# Altium PCB ilk.PcbDoc
Units mil, origin at the board's own origin, x right, y up, seen from the top; angles counter-clockwise.
Board outline 2700 x 1400 mil, 2 copper layers (Top Layer, Bottom Layer); 64 components, 36 nets, 208 pads, 42 vias.
Unrouted connection lines stored in the file: 56.
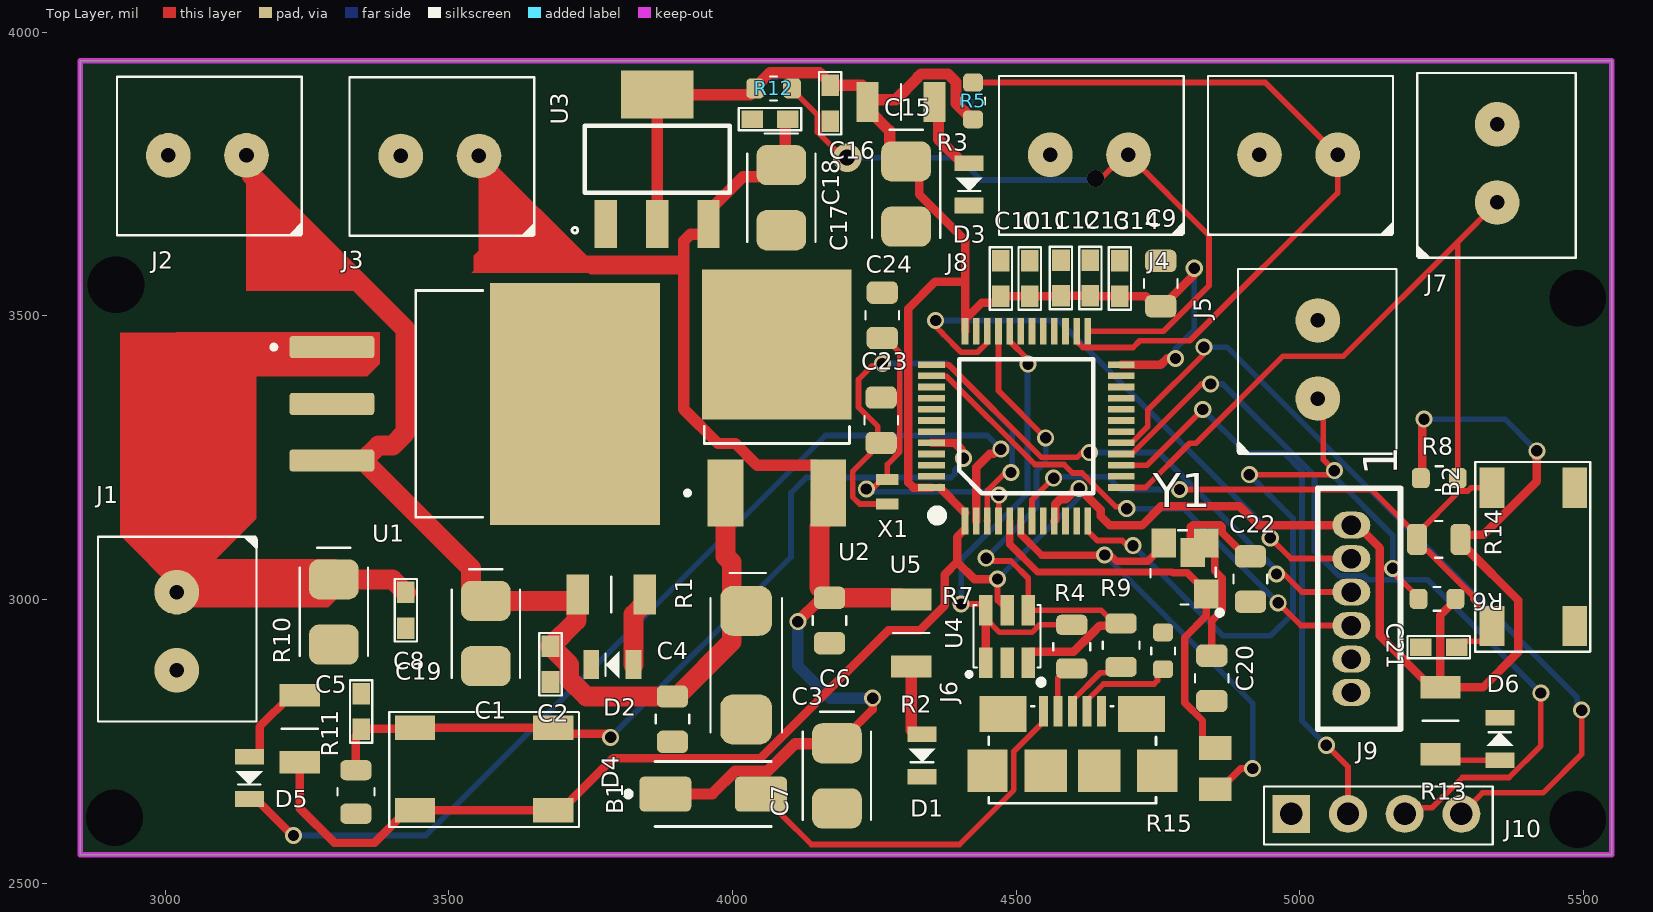
[diagram p0: Top Layer view]
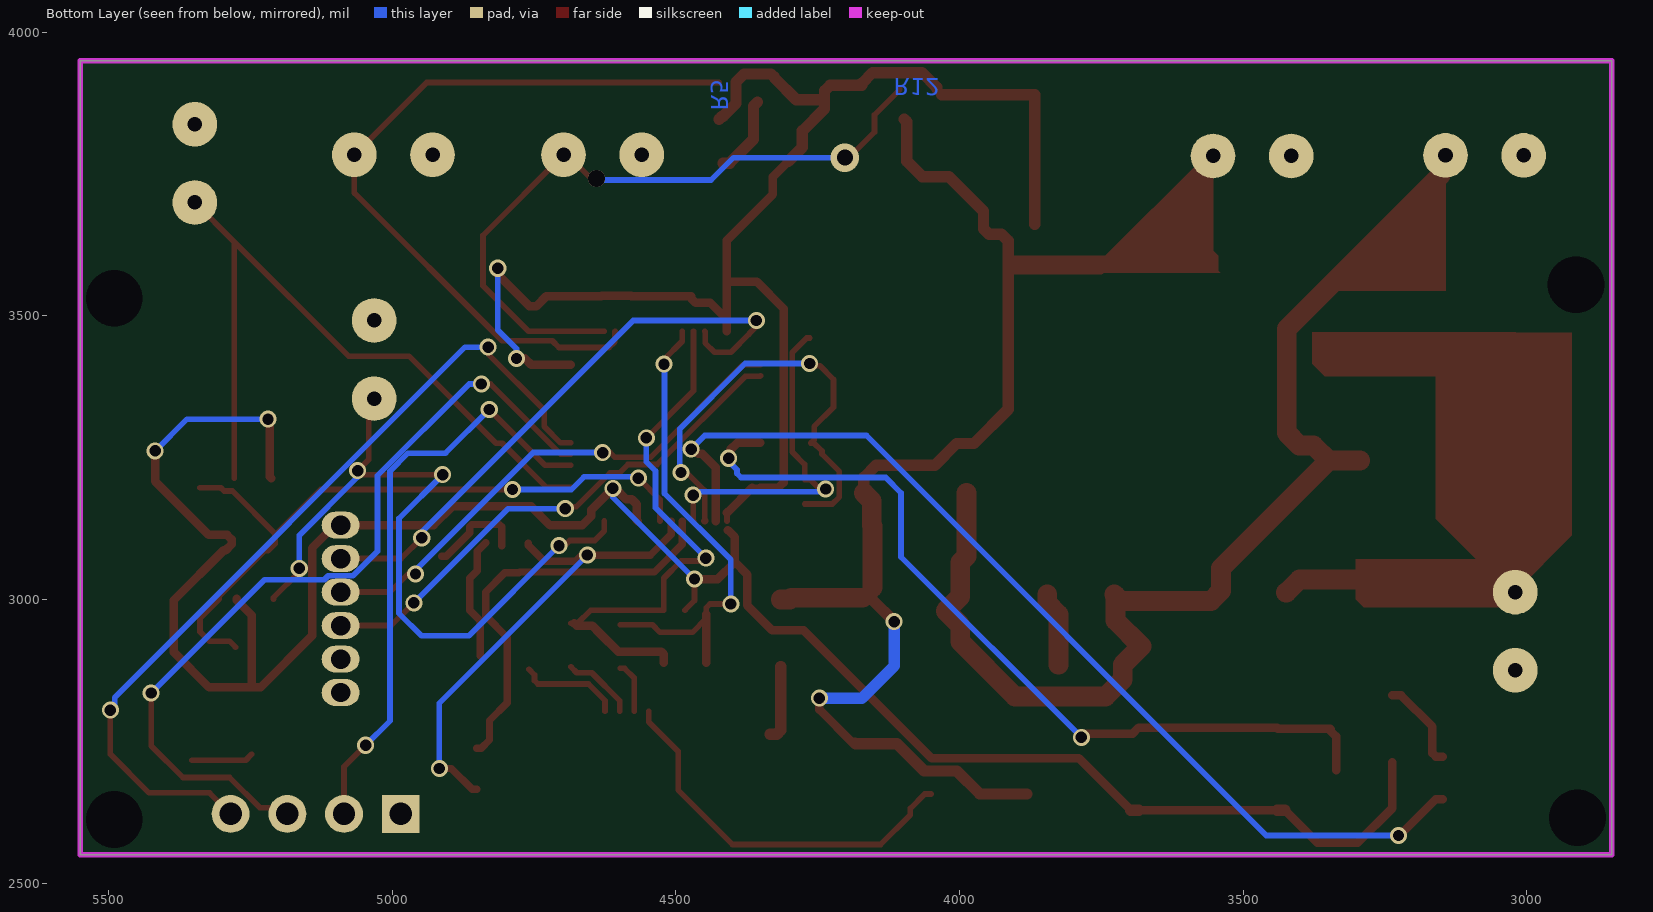
[diagram p1: Bottom Layer view, seen from below]
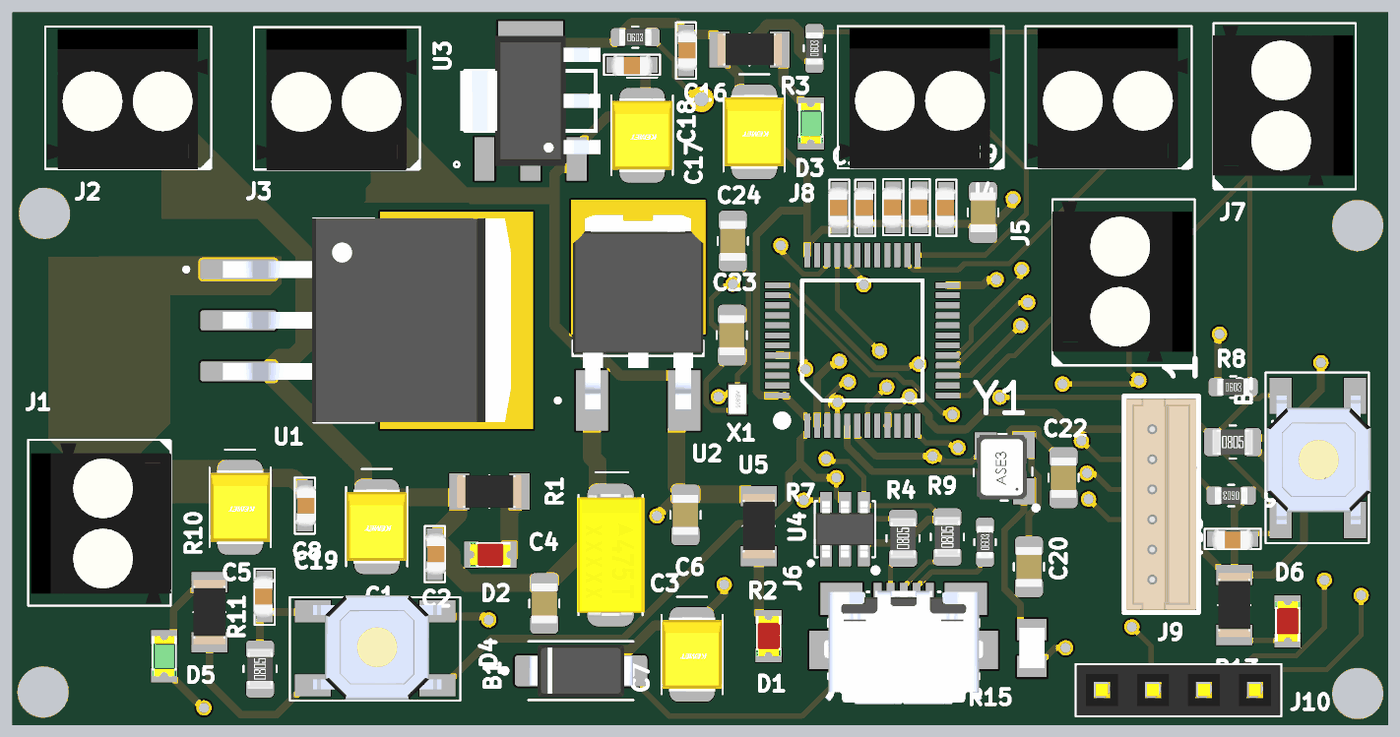
[diagram p2: 3D render of the assembled board from above, using the file's embedded part models]

## Layer stack, top to bottom
Top Solder: solder mask 0.4, Solder Resist, Dk 3.5
Top Layer: signal copper 1.4
Dielectric 1: dielectric 12.6, FR-4, Dk 4.8
Bottom Layer: signal copper 1.4
Bottom Solder: solder mask 0.4, Solder Resist, Dk 3.5

## Board outline
2850,2550 5550,2550 5550,3950 2850,3950

## Design rules (kind name [scope] priority, off if disabled: settings)
Clearance [All] p1: gap=0.1 ignorepadtopadclearanceinfootprint=FALSE except(0: Arc-Hole Track-Hole SMDPad-Hole THPad-Hole Via-Hole Fill-Hole Poly-Hole Region-Hole Text-Hole)
HoleToHoleClearance [All] p1: gap=4 allowstackedmicrovias=TRUE
MinimumSolderMaskSliver [All] p1: minsoldermaskwidth=0.3
PolygonConnect [All] p1: connectstyle=Relief reliefconductorwidth=10 reliefentries=4 polygonreliefangle="90 Angle" airgapwidth=10
RoutingVias [All] p1: holewidth=28 width=50 viastyle="Through Hole" minholewidth=28 minwidth=50 maxholewidth=28 maxwidth=50
ShortCircuit [All] p1: allowed=TRUE
SilkToSilkClearance [All] p1: silktosilkclearance=0
SilkToSolderMaskClearance [IsPad] p1: minsilkscreentomaskgap=0 clearancetoexposedcopper=TRUE
SolderMaskExpansion [All] p1: expansion=4 istentingtop=FALSE
Width [All] p1: maxlimit=40 minlimit=10 preferedwidth=15 bottomlayer_prefwidth=10 minimp=50.000000 maximp=50.000000 favimp=50.000000
25 further rules are at their usual default settings.

## Classes and differential pairs
component class sema_2: B1 B2 C19 C20 C21 C22 C23 C24 D4 D5 D6 J4 J5 J6 J7 J8 J9 J10 R4 R5 R6 R7 R8 R9 R10 R11 R12 R13 R14 R15 U4 U5 X1 Y1
component class sema_1: C1 C2 C3 C4 C5 C6 C7 C8 C9 C10 C11 C12 C13 C14 C15 C16 C17 C18 D1 D2 D3 J1 J2 J3 R1 R2 R3 U1 U2 U3

## Components (designator, comment, footprint, x,y, rotation, side; value= is the part's Value field where it differs from the comment)
B1 "Push Button" "PUSB BUTTON-SMD" 3684,2628.33 r180 top
B2 "Push Button" "PUSB BUTTON-SMD" 5339,2953 r90 top
C1 "10uF" KEMET_CAP_TAN-B 3565,2940 r270 top
C2 "C0603C104K5RACTU" CAP_0603 3679,2886 r90 top
C3 "220uF" KYOCERA_CAP_TAN-C 4024,2884.13 r270 top
C4 "0.1uF" SAMSUNG_CAP_0805_095 3894,2789 r90 top
C5 "10uF" KEMET_CAP_TAN-B 3297,2978 r270 top
C6 "0.1uF" SAMSUNG_CAP_0805_095 4171,2963 r90 top
C7 "22uF" KEMET_CAP_TAN-B 4184,2689 r270 top
C8 "C0603C104K5RACTU" CAP_0603 3424,2981 r90 top
C9 "4.7uF" SAMSUNG_CAP_0805_095 4755,3557 r270 top
C10 "C0603C104K5RACTU" CAP_0603 4473,3566 r270 top
C11 "C0603C104K5RACTU" CAP_0603 4524,3566 r270 top
C12 "C0603C104K5RACTU" CAP_0603 4579,3567 r270 top
C13 "C0603C104K5RACTU" CAP_0603 4631,3567 r270 top
C14 "C0603C104K5RACTU" CAP_0603 4683,3566 r270 top
C15 "10uF" KEMET_CAP_TAN-B 4306,3715 r270 top
C16 "C0603C104K5RACTU" CAP_0603 4172,3875 r90 top
C17 "10uF" KEMET_CAP_TAN-B 4086,3708.48 r270 top
C18 "C0603C104K5RACTU" CAP_0603 4066,3847 r0 top
C19 "C0603C104K5RACTU" CAP_0603 3345,2802.5 r270 top
C20 "22pF" SAMSUNG_CAP_0805_075 4845,2861 r90 top
C21 "C0603C104K5RACTU" CAP_0603 5245,2916 r0 top
C22 "22pF" SAMSUNG_CAP_0805_075 4913,3036 r90 top
C23 "8pF" SAMSUNG_CAP_0805_075 4262,3316 r270 top
C24 "8pF" SAMSUNG_CAP_0805_075 4264,3501 r270 top
D1 "LH R974-LP-1" LED_RED_0805 4334,2725 r90 top
D2 "LH R974-LP-1" LED_RED_0805 3788,2885 r0 top
D3 "LTST-C171GKT" LED_GREEN_0805 4417,3732 r90 top
D4 "*" DIOM5226X220N 3965.75,2657 r0 top
D5 "LTST-C171GKT" LED_GREEN_0805 3148,2685.6 r90 top
D6 "LH R974-LP-1" LED_RED_0805 5353,2754 r270 top
J1 "Klemens 1x2 3.5mm" "Klemens 1x2 - 3.5mm" 3022,2950 r270 top
J2 "Klemens 1x2 3.5mm" "Klemens 1x2 - 3.5mm" 3080.01,3781.03 r180 top
J3 "Klemens 1x2 3.5mm" "Klemens 1x2 - 3.5mm" 3489.8,3780.03 r180 top
J4 "Klemens 1x2 3.5mm" "Klemens 1x2 - 3.5mm" 5003.8,3782.03 r180 top
J5 "Klemens 1x2 3.5mm" "Klemens 1x2 - 3.5mm" 5030.03,3417.2 r90 top
J6 "*" AMPHENOL_10118192-0001LF 4599.18,2803 r0 top
J7 "Klemens 1x2 3.5mm" "Klemens 1x2 - 3.5mm" 5346.03,3762.99 r90 top
J8 "Klemens 1x2 3.5mm" "Klemens 1x2 - 3.5mm" 4635.01,3782.03 r180 top
J9 "64800611622" 64800611622 5091,2983.58 r270 top
J10 "Header 2.54 1x4" "Header 2.54 1x4" 5004.69,2650.54 r0 top
R1 "1K R1206" "R1206 Resıstor" 3789,3009 r180 top
R2 "1K R1206" "R1206 Resıstor" 4315,2937.99 r90 top
R3 "1K R1206" "R1206 Resıstor" 4299.9,3877 r180 top
R4 "0805W8J0220T5E" ROYALOHM_RES_0805 4598,2917 r90 top
R5 "100ohm" ROYALOHM_RES_0603 4424,3879 r90 top
R6 "100ohm" ROYALOHM_RES_0603 5242,3001 r180 top
R7 "0603SAJ0104T5E" ROYALOHM_RES_0603 4759,2909.48 r90 top
R8 "100ohm" ROYALOHM_RES_0603 5246,3214 r0 top
R9 "0805W8J0220T5E" ROYALOHM_RES_0805 4685,2919.61 r90 top
R10 "1K R1206" "R1206 Resıstor" 3237,2769 r90 top
R11 "0805S8J0104T5E" ROYALOHM_RES_0805 3336,2660.61 r90 top
R12 "100ohm" ROYALOHM_RES_0603 4072.52,3901 r0 top
R13 "1K R1206" "R1206 Resıstor" 5248,2789 r270 top
R14 "10k" ROYALOHM_RES_0805 5245,3106 r0 top
R15 "RNCS0805BKE1M00" RESC2012X65N 4851,2701.58 r90 top
U1 "LM7812S/NOPB" TO254P1524X483-4N 3545.62,3345 r0 top
U2 "L78M05CDT" VREG_L78M05CDT 4078,3355 r90 top
U3 "3.3V REGULATOR" SOT230P700X180-4N 3867,3776 r90 top
U4 "USBLC6-2SC6" SOT23-6L 4484,2935 r90 top
U5 "STM32F103C6T6A" LQFP-48 4518.1,3305.68 r0 top
X1 "ABS05-32.768KHZ-T" ABS05 4273,3190 r270 top
Y1 "8 MHz 12.5 pf Osc" "8 MHZ Osc." 4816,3048 r90 top

## Footprints (in the part's own frame and the unit in brackets; to place one, negate y for a bottom-side part, rotate by r counter-clockwise, add the part's x,y. Pads: shape width x height; smd on the part's side, far side on the other; paste and mask are expansions set on the pad)
"8 MHZ Osc." [mm]
  rect 1.3x1.1 smd mask+0.05: 1(-0.981,-0.49) 2(1.319,-0.49) 3(1.303,1.417) 4(0.889,0.127)
  silkscreen extent -1.91,-1.19 1.88,2.01, body extent -1.38,-0.64 1.82,1.86, height 1.22
64800611622 [mm]
  oval 1.2x1.7 hole 0.87 mask+0.05: 1(-3.75,0) 2(-2.25,0) 3(-0.75,0) 4(0.75,0) 5(2.25,0) 6(3.75,0)
  silkscreen extent -5.4,-1.5 5.4,2.2, body extent -5.25,-1.4 5.25,2.1, height 4.75
ABS05 [mm]
  rect 0.5x1 smd mask+0.05: 1(-0.55,0) 2(0.55,0)
  body extent -0.8,-0.5 0.8,0.5, height 0.5
AMPHENOL_10118192-0001LF [mm]
  rect 0.4x1.35 smd: 1(-1.3,0) 2(-0.65,0) 3(0,0) 4(0.65,0) 5(1.3,0)
  rect 2.1x1.6 smd: SH1(-3.1,-0.125) SH2(3.1,-0.125)
  rect 1.8x1.9 smd: SH3(-3.8,-2.675) SH6(3.8,-2.675)
  rect 1.9x1.9 smd: SH4(-1.2,-2.675) SH5(1.2,-2.675)
  silkscreen extent -3.75,-4.13 3.75,1.4, body extent -3.96,-5.4 3.96,0.27, height 2.5
CAP_0603 [mil]
  rect 38x31 smd mask+1.97: 1(-31.5,0) 2(31.5,0)
  silkscreen extent -55,-20 55,20, body extent -41,-22 41,18, height 31
DIOM5226X220N [mm]
  rrect25% 2.32x1.55 smd: 1(-2.14,0) 2(2.14,0)
  silkscreen extent -3.92,-1.46 2.61,1.46, body extent -2.6,-1.31 2.6,1.31, height 2.21
"Header 2.54 1x4" [mm]
  rect 1.7x1.7 hole 1 mask+0.05: 1(-0.5,-0.725)
  round 1.7 hole 1 mask+0.05: 2(2.04,-0.725) 3(4.58,-0.725) 4(7.12,-0.725)
  silkscreen extent -1.73,-2.1 8.52,0.5, body extent -1.68,-2.05 8.48,0.45, height 9.1
KEMET_CAP_TAN-B [mm]
  rrect50% 1.8x2.23 smd paste+0 mask+0.04: 1(-1.46,0) 2(1.46,0)
  silkscreen extent -2.88,-1.53 1.98,1.53, body extent -1.85,-1.5 1.85,1.5, height 2.1
"Klemens 1x2 - 3.5mm" [mm]
  round 2 hole 0.65: 1(-1.6,-0.05) 2(1.9,-0.05)
  silkscreen extent -4.11,-3.58 4.2,3.58, body extent -3.9,-3.45 4.09,3.55, height 8.9
KYOCERA_CAP_TAN-C [mm]
  rrect50% 2.24x2.32 smd mask+0.04: 1(-2.435,0) 2(2.435,0)
  silkscreen extent -4.13,-1.6 3,1.6, body extent -3.05,-1.68 3.05,1.68, height 2.7
LED_GREEN_0805 [mm]
  rect 0.7x1.3 smd mask+0.05: 1(-0.95,0) 2(0.95,0)
  silkscreen extent -0.3,-0.6 0.3,0.6, body extent -1.01,-0.62 1.01,0.62, height 1.1
LED_RED_0805 [mm]
  rect 0.7x1.3 smd mask+0.05: 1(-0.95,0) 2(0.95,0)
  silkscreen extent -0.3,-0.6 0.3,0.6, body extent -1.01,-0.63 1.01,0.62, height 1.1
LQFP-48 [mm] "7mm x 7mm"
  rect 0.3x1.2 smd mask+0.05: 1(-2.75,-4.25) 2(-2.25,-4.25) 3(-1.75,-4.25) 4(-1.25,-4.25) 5(-0.75,-4.25) 6(-0.25,-4.25) 7(0.25,-4.25) 8(0.75,-4.25) 9(1.25,-4.25) 10(1.75,-4.25) 11(2.25,-4.25) 12(2.75,-4.25) 25(2.75,4.25) 26(2.25,4.25) 27(1.75,4.25) 28(1.25,4.25) 29(0.75,4.25) 30(0.25,4.25) 31(-0.25,4.25) 32(-0.75,4.25) 33(-1.25,4.25) 34(-1.75,4.25) 35(-2.25,4.25) 36(-2.75,4.25)
  rect 1.2x0.3 smd mask+0.05: 13(4.25,-2.75) 14(4.25,-2.25) 15(4.25,-1.75) 16(4.25,-1.25) 17(4.25,-0.75) 18(4.25,-0.25) 19(4.25,0.25) 20(4.25,0.75) 21(4.25,1.25) 22(4.25,1.75) 23(4.25,2.25) 24(4.25,2.75) 37(-4.25,2.75) 38(-4.25,2.25) 39(-4.25,1.75) 40(-4.25,1.25) 41(-4.25,0.75) 42(-4.25,0.25) 43(-4.25,-0.25) 44(-4.25,-0.75) 45(-4.25,-1.25) 46(-4.25,-1.75) 47(-4.25,-2.25) 48(-4.25,-2.75)
  silkscreen extent -4.2,-4.2 3,3, body extent -4.45,-4.45 4.55,4.55, height 1.5
"PUSB BUTTON-SMD" [mm]
  rect 1.8x1.1 smd mask+0.05: 1(0,0) 2(6.2,0) 3(0,-3.7) 4(6.2,-3.7)
  silkscreen extent -1.15,-4.4 7.35,0.75, body extent -0.2,-4.5 6.2,0.7, height 1.5
"R1206 Resıstor" [mm]
  rect 1x1.8 smd mask+0.05: 1(-1.425,0) 2(1.575,0)
  silkscreen extent 0.08,-0.8 0.08,0.81, body extent -1.52,-0.8 1.68,0.81, height 0.55
RESC2012X65N [mm]
  rect 1.06x1.47 smd: 1(-0.925,0) 2(0.925,0)
  body extent -1,-0.63 1,0.63, height 0.65
ROYALOHM_RES_0603 [mm]
  rrect50% 0.8x0.9 smd paste+0 mask+0.04: 1(-0.825,0) 2(0.825,0)
  silkscreen extent -0.15,-0.53 0.15,0.53, body extent -0.8,-0.4 0.8,0.4, height 0.45
ROYALOHM_RES_0805 [mm]
  rrect50% 0.9x1.397 smd paste+0 mask+0.04: 1(-0.975,0) 2(0.975,0)
  silkscreen extent -0.16,-0.83 0.16,0.83, body extent -1,-0.62 1,0.63, height 0.6
SAMSUNG_CAP_0805_075 [mm]
  rrect50% 1x1.4 smd paste+0 mask+0.04: 1(-1.016,0) 2(1.016,0)
  silkscreen extent -0.19,-0.75 0.19,0.75, body extent -1,-0.64 1,0.64, height 0.76
SAMSUNG_CAP_0805_095 [mm]
  rrect50% 1x1.4 smd paste+0 mask+0.04: 1(-1.016,0) 2(1.016,0)
  silkscreen extent -0.19,-0.75 0.19,0.75, body extent -1,-0.63 1,0.64, height 0.96
SOT23-6L [mm]
  rect 1.36x0.6 smd mask+0.05: 1(-1.175,0.95) 2(-1.175,0) 3(-1.175,-0.95) 4(1.175,-0.95) 5(1.175,0) 6(1.175,0.95)
  silkscreen extent -1.8,-1.5 1.4,1.8, body extent -1.4,-1.46 1.4,1.46, height 1.45
SOT230P700X180-4N [mm]
  rect 2.15x1 smd: 1(-2.9,2.3) 2(-2.9,0) 3(-2.9,-2.3)
  rect 2.15x3.25 smd: 4(2.9,0)
  silkscreen extent -3.3,-3.25 1.5,3.81, body extent -3.25,-3.5 3.25,3.5, height 1.8
TO254P1524X483-4N [mm]
  rrect25% 3.79x0.99 smd: 1(-6.4,2.54) 2(-6.4,0) 3(-6.4,-2.54)
  rect 7.62x10.84 smd paste-6: 4(4.48,0)
  silkscreen extent -9.1,-5.08 0.35,5.08, body extent -7.18,-5.08 7.18,5.08, height 4.65
VREG_L78M05CDT [mm]
  rect 3x1.6 smd: 1(-4.25,2.3) 3(-4.25,-2.3)
  rect 6.7x6.7 smd paste-2645: 2(2.4,0)
  silkscreen extent -4.35,-3.25 -1.26,4.1, body extent -4.72,-3.25 5,3.25, height 2.4

## Part data
B1 B2: "Smd Push Button", Satın Alma Linki=https://urun.n11.com/diger/mini-pushbutton-switch-smd-P227461537?gclid=Cj0KCQjwkoDmBRCcARIsAG3xzl8Y_-jeD7HocNM6lvuZ_rVp83568XPGtNzlPwXWLph8oCRqo0yh87UaApZYEALw_wcB&gclsrc=aw.ds
C1 C5 C15 C17: "CAP TANT 10UF 20% 16V 1411", Capacitance="10 µF", Supplier Part Number 1=399-3708-1-ND, Supplier 1=Digi-Key, Supplier 2=Farnell, Supplier 3=Mouser, Supplier Part Number 2=2462772, Supplier Part Number 3=80-T491B106M016
C2 C8 C10 C11 C12 C13 C14 C16 C18 C19 C21: library part "CAP CER 100nF 0603", "CAP CER 100nF %10 0603 SMD", Capacitance=100nF, Case Code (Metric)=1608, Case Code (Imperial)=0603, Dielectric=X7R, Dielectric Material=Ceramic, Manufacturer=KEMET, Max Operating Temperature=125°C, Min Operating Temperature=-55°C, Package Quantity=1, Supplier Part Number 1=399-5089-1-ND, Tolerance=10%, Voltage=50V, Case/Package=0603, Category="Ceramic Capacitors", ComponentLink1Description=https://datasheet.ciiva.com/7823/kem-c1002-x7r-smd-7823591.pdf?src-supplier=Element14, ComponentLink1URL=https://datasheet.ciiva.com/7823/kem-c1002-x7r-smd-7823591.pdf?src-supplier=Element14, ComponentLink2Description=https://datasheet.ciiva.com/14602/70095383-14602583.pdf?src-supplier=Allied+Electronics, ComponentLink2URL=https://datasheet.ciiva.com/14602/70095383-14602583.pdf?src-supplier=Allied+Electronics, ComponentLink3Description=https://datasheet.ciiva.com/5999/kem-c1002-x7r-smd-5999400.pdf?src-supplier=Farnell, ComponentLink3URL=https://datasheet.ciiva.com/5999/kem-c1002-x7r-smd-5999400.pdf?src-supplier=Farnell, ComponentLink4Description=https://datasheet.ciiva.com/7823/kem-c1002-x7r-smd-7823592.pdf?src-supplier=Element14, ComponentLink4URL=https://datasheet.ciiva.com/7823/kem-c1002-x7r-smd-7823592.pdf?src-supplier=Element14, ComponentLink5Description=https://datasheet.ciiva.com/28645/1851736-28645640.pdf?src-supplier=Element14, ComponentLink5URL=https://datasheet.ciiva.com/28645/1851736-28645640.pdf?src-supplier=Element14, ComponentLink6Description=https://datasheet.ciiva.com/14585/70095383-14585209.pdf?src-supplier=Allied+Electronics, ComponentLink6URL=https://datasheet.ciiva.com/14585/70095383-14585209.pdf?src-supplier=Allied+Electronics, Contact Plating=Tin,Matte, Depth=0.8mm, Designed by=BERK, Dissipation Factor=2.5%, Height=0.8mm, Lead Pitch=0.7mm, Length=0.063inch, Manufacturer Part Number=C0603C104K5RACTU, Mount="Surface Mount", Number of Pins=2, Packaging="Tape and Reel", Pricing 1="1=0,12000, 10=0,08500, 50=0,04620, 100=0,03770, 500=0,02696, 1000=0,02118 (USD)", Radiation Hardening=No, REACH SVHC="No SVHC", RoHS=Yes, RoHS Compliant=Yes, Series="SMD Comm X7R", Stock 1=1666186, Supplier 1=Digi-Key, Termination=SMD/SMT, Thickness=0.034inch, Voltage Rating=50V, Voltage Rating (DC)=50V, Width=0.031inch
C3: "CAP TANT 220UF 20% 10V 2312", Capacitance="220 µF", Supplier Part Number 1=478-8899-1-ND, Supplier 1=Digi-Key, Supplier 2=Mouser, Supplier 3="Arrow Electronics", Supplier Part Number 2=581-TAJC227M010RNJ, Supplier Part Number 3=TAJC227M010RNJ
C4 C6: "CAP CER 0.1UF 25V X7R 0805", Capacitance="0.1 µF", Supplier Part Number 1=1276-1099-1-ND, Supplier 1=Digi-Key, Supplier 2=Farnell, Supplier 3=Mouser, Supplier Part Number 2=3013475, Supplier Part Number 3=187-CL21B104KACNNNC
C7: "CAP TANT 22UF 10% 20V 1411", Capacitance="22 µF", Supplier Part Number 1=399-5296-1-ND, Supplier 1=Digi-Key, Supplier 2=Farnell, Supplier 3=Mouser, Supplier Part Number 2=2321214, Supplier Part Number 3=80-T491B226K020AT
C9: "CAP CER 4.7UF 25V X5R 0805", Capacitance="4.7 µF", Supplier Part Number 1=1276-2415-1-ND, Supplier 1=Digi-Key, Supplier 2=Mouser, Supplier 3="Arrow Electronics", Supplier Part Number 2=187-CL21A475KACLRNC, Supplier Part Number 3=CL21A475KACLRNC
C20 C22: "CAP CER 27PF 50V C0G/NP0 0805", Capacitance="22 pF", Supplier Part Number 1=1276-1285-1-ND, Supplier 1=Digi-Key
C23 C24: "CAP CER 1.2PF 50V C0G/NP0 0805", Capacitance="8 pF"
D1 D2 D6: library part "LED RED 0805", "LED Uni-Color Hyper Red 660nm 2-Pin Chip 0805(2012Metric) T/R", Case Code (Metric)=2012, Case Code (Imperial)=0805, Color=Red, Forward Current=30mA, Forward Voltage=1.8V, Lens Color=White, Manufacturer="Osram Opto", Max Operating Temperature=85°C, Min Operating Temperature=-30°C, Package Quantity=1, Reverse Voltage=5V, Supplier Part Number 1=475-1415-1-ND, Test Current=20mA, Case/Package=0805, Category=LEDs, ComponentLink1Description=http://www.jameco.com/Jameco/Products/ProdDS/2085634.pdf?src-supplier=Jameco, ComponentLink1URL=http://www.jameco.com/Jameco/Products/ProdDS/2085634.pdf?src-supplier=Jameco, ComponentLink2Description=http://components.arrow.com/part/dataview/0323_01825492?src-supplier=Arrow+Europe, ComponentLink2URL=http://components.arrow.com/part/dataview/0323_01825492?src-supplier=Arrow+Europe, ComponentLink3Description=https://dammedia.osram.info/media/resource/hires/osram-dam-2493888/LH%20R974.pdf?src-supplier=Digi-Key, ComponentLink3URL=https://dammedia.osram.info/media/resource/hires/osram-dam-2493888/LH%20R974.pdf?src-supplier=Digi-Key, ComponentLink4Description=http://www.mouser.com/ds/2/311/LH%20R974%20-%20CHIPLED%200805-318659.pdf?src-supplier=Mouser, ComponentLink4URL=http://www.mouser.com/ds/2/311/LH%20R974%20-%20CHIPLED%200805-318659.pdf?src-supplier=Mouser, ComponentLink5Description=https://www.verical.com/server-webapp/html/getDatasheet?partID=258950&src-supplier=Verical, ComponentLink5URL=https://www.verical.com/server-webapp/html/getDatasheet?partID=258950&src-supplier=Verical, ComponentLink6Description=http://components.arrow.com/part/dataview/41971690S1077610N9133?src-supplier=Arrow+Electronics, ComponentLink6URL=http://components.arrow.com/part/dataview/41971690S1077610N9133?src-supplier=Arrow+Electronics, ComponentLink7Description=http://components.arrow.com/part/dataview/41971690S6190115N2128?src-supplier=Arrow+Electronics, ComponentLink7URL=http://components.arrow.com/part/dataview/41971690S6190115N2128?src-supplier=Arrow+Electronics, Depth=1.35mm, Designed by=BERK, Dominant Wavelength=645nm, Length=2.1mm, Lens Size=1.25mm, Lens Style=Diffused,Flat,Colorless, Lens Transparency=Diffused, Luminous Flux=0.17lm, Luminous Intensity=71mcd, Manufacturer Part Number="LH R974-LP-1", Mount="Surface Mount", Number of Elements=1, Number of Pins=2, Packaging="Tape and Reel", Pricing 1="1=0,26000, 10=0,13900, 100=0,06480, 500=0,05978, 1000=0,04683, 2000=0,04584 (USD)", Radiation Hardening=No, RoHS=Yes, RoHS Compliant=Yes, Series=CHipLED, Stock 1=35632, Supplier 1=Digi-Key, Viewing Angle=160°, Width=1.25mm, Illumination Color=Red
D3 D5: library part "LED GREEN 0805", "Green 0805 130 º Min 5 mcd Typical 12 mcd Water Clear Lens SMT LED", Case Code (Metric)=2012, Case Code (Imperial)=0805, Color=Green, Forward Current=30mA, Forward Voltage=2.1V, Lens Color=Colorless, Manufacturer="Vishay Lite-On", Max Operating Temperature=85°C, Min Operating Temperature=-55°C, Package Quantity=1, Power Dissipation=100mW, Reverse Voltage=5V, Supplier Part Number 1=160-1423-1-ND, Test Current=10mA, Case/Package=0805, Category=LEDs, ComponentLink1Description=https://datasheet.ciiva.com/2110/ltst-c171gkt-2110000.pdf?src-supplier=Digi-Key, ComponentLink1URL=https://datasheet.ciiva.com/2110/ltst-c171gkt-2110000.pdf?src-supplier=Digi-Key, ComponentLink2Description=https://datasheet.ciiva.com/11773/0900766b80dc0296-11773991.pdf?src-supplier=RSComponents, ComponentLink2URL=https://datasheet.ciiva.com/11773/0900766b80dc0296-11773991.pdf?src-supplier=RSComponents, ComponentLink3Description=https://datasheet.ciiva.com/12400/lite-on-ltst-c171gkt-190133-12400647.pdf?src-supplier=Mouser, ComponentLink3URL=https://datasheet.ciiva.com/12400/lite-on-ltst-c171gkt-190133-12400647.pdf?src-supplier=Mouser, ComponentLink4Description=https://datasheet.ciiva.com/2110/ltst-c171gkt-2110001.pdf?src-supplier=Digi-Key, ComponentLink4URL=https://datasheet.ciiva.com/2110/ltst-c171gkt-2110001.pdf?src-supplier=Digi-Key, ComponentLink5Description=https://datasheet.ciiva.com/2110/ltst-c171gkt-2110002.pdf?src-supplier=Digi-Key, ComponentLink5URL=https://datasheet.ciiva.com/2110/ltst-c171gkt-2110002.pdf?src-supplier=Digi-Key, ComponentLink6Description=https://datasheet.ciiva.com/16396/ltst-c171gkt-16396549.pdf?src-supplier=Future+Electronics, ComponentLink6URL=https://datasheet.ciiva.com/16396/ltst-c171gkt-16396549.pdf?src-supplier=Future+Electronics, Depth=1.25mm, Designed by=BERK, Dominant Wavelength=569nm, Height=0.8mm, Lead Free="Lead Free", Length=2mm, Lens Style=Diffused,Colorless,Rectangular,Clear, Lens Transparency=Clear, Luminous Intensity=12mcd, Manufacturer Part Number=LTST-C171GKT, Mount="Surface Mount", Number of Elements=1, Number of LEDs=1, Number of Pins=2, Packaging="Tape and Reel", Power Rating=100mW, Pricing 1="1=0,26000, 10=0,14100, 100=0,06560, 500=0,06060, 1000=0,04747 (USD)", Radiation Hardening=No, RoHS=Yes, RoHS Compliant=Yes, Series="CHIPLED 0805", Stock 1=159023, Supplier 1=Digi-Key, Viewing Angle=130°, Wavelength=585nm, Width=1.25mm, Illumination Color=Green
D4: library part MBRA210LT3G, "...employing the Schottky Barrier principle in a metal to silicon power rectifier.", Package=None, Availability=Unavailable, MF="{'manufacturer': u'ON Semiconductor'}", MP=MBRA210LT3G, Price=None
J6: library part 10118192-0001LF, "Single Port 5 Contact Horizontal Right Angle Shielded Micro B USB 2.0 Connector", Package=None, Availability=Unavailable, MF="{'manufacturer': u'FCI'}", MP=10118192-0001LF, Price=None
J9: library part 64800611622_conn_6pin, "1.50mm 6PIN Connector", Manufacturer="Wurth Electronics", Supplier Part Number 1=2138726, Manufacturer Part Number=64800611622, Pricing 1="1000=0,29900, 2000=0,28200 (GBP)", RoHS=No, Stock 1=100, Supplier 1=RSComponents
R4 R9: "RES SMD 22 OHM 5% 1/8W 0805", Resistance=22
R5 R6 R8 R12: "RES SMD 100 OHM 5% 1/10W 0603", Resistance=100
R7: "RES SMD 100K OHM 5% 1/10W 0603", Resistance="100 k"
R11: "RES SMD 100K OHM 5% 1/8W 0805", Resistance="100 k"
R14: "RES SMD 10K OHM 1% 1/8W 0805", Resistance="10 k"
R15 U1: Package=None, Availability=Unavailable, Price=None
  R15: MF="{'manufacturer': u'Stackpole Electronics Inc'}", MP=RNCS0805BKE1M00
  U1: MF="{'manufacturer': u'Texas Instruments'}", MP=LM7812S/NOPB
U2: "Linear Voltage Regulator IC 1 Output 500mA DPAK", Package=None, Availability=Unavailable, MF="{'manufacturer': u'STMicroelectronics'}", MP=L78M05CDT, Price=None
U3: "LDO Voltage Regulators 3.3V 0.8A Positive", Package=None, Availability=Unavailable, MF="{'manufacturer': u'STMicroelectronics'}", MP=LD1117S33TR, Price=None
U4: library part "USB PROTECTION", "TVS DIODE 5.25V 17V SOT23-6", Breakdown Voltage=6V, Capacitance=3.5pF, Case/Package=SOT-23, Clamping Voltage=17V, Leakage Current=150nA, Manufacturer=STMicroelectronics, Max Operating Temperature=125°C, Min Operating Temperature=-40°C, Operating Supply Voltage=1.1V, Package Quantity=3000, Peak Pulse Current=5A, Power Line Protection=Yes, Reverse Standoff Voltage=5.25V, Supplier Part Number 1=497-5235-1-ND, Test Current=1mA, Working Voltage=5V, Category="TVS Diodes", Clamping Voltage-Max=17V, ComponentLink1Description=https://datasheet.ciiva.com/1268/1690354-1268384.pdf?src-supplier=Element14, ComponentLink1URL=https://datasheet.ciiva.com/1268/1690354-1268384.pdf?src-supplier=Element14, ComponentLink2Description=https://datasheet.ciiva.com/4508/cd00050750-113117-4508433.pdf?src-supplier=Mouser, ComponentLink2URL=https://datasheet.ciiva.com/4508/cd00050750-113117-4508433.pdf?src-supplier=Mouser, ComponentLink3Description=https://datasheet.ciiva.com/15143/getdatasheetpartid-148465-15143789.pdf?src-supplier=Verical, ComponentLink3URL=https://datasheet.ciiva.com/15143/getdatasheetpartid-148465-15143789.pdf?src-supplier=Verical, ComponentLink4Description=https://datasheet.ciiva.com/26787/usblc6-2sc6-26787908.pdf?src-supplier=IIIC, ComponentLink4URL=https://datasheet.ciiva.com/26787/usblc6-2sc6-26787908.pdf?src-supplier=IIIC, ComponentLink5Description=https://datasheet.ciiva.com/16200/cd00050750-16200026.pdf?src-supplier=Future+Electronics, ComponentLink5URL=https://datasheet.ciiva.com/16200/cd00050750-16200026.pdf?src-supplier=Future+Electronics, ComponentLink6Description=https://datasheet.ciiva.com/41444/001184109-da-01-en-ic-esd-protecti-usblc6-2sc6-sot-23-6-stm-41444156.pdf?src-supplier=Conrad, ComponentLink6URL=https://datasheet.ciiva.com/41444/001184109-da-01-en-ic-esd-protecti-usblc6-2sc6-sot-23-6-stm-41444156.pdf?src-supplier=Conrad, Contact Plating=Tin,Matte, Data Rate=480Mbps, Depth=1.75mm, Designed by=BERK, Direction=Unidirectional,Bidirectional, Element Configuration=Dual, ESD Protection=Yes, Height=1.3mm, Lead Free="Lead Free", Length=3.05mm, Manufacturer Part Number=USBLC6-2SC6, Max Breakdown Voltage=6V, Max Reverse Leakage Current=150nA, Min Breakdown Voltage=6V, Mount="Surface Mount", Number of Bidirectional Channels=2, Number of Channels=2, Number of Elements=1, Number of Pins=6, Packaging="Tape and Reel", Polarity=Unidirectional,Bidirectional, Pricing 1="1=0,50000, 10=0,43100, 100=0,29930, 500=0,23368, 1000=0,19005 (USD)", Radiation Hardening=No, REACH SVHC="No SVHC", Reverse Breakdown Voltage=6V, RoHS=Yes, RoHS Compliant=Yes, Series=USB, Stock 1=112981, Supplier 1=Digi-Key, Termination=SMD/SMT, Width=1.75mm
U5: "MCU 32-bit STM32F ARM Cortex M3 RISC 32KB Flash 2.5V/3.3V 48-Pin LQFP Tray", Case/Package=LQFP, Frequency=72MHz, Manufacturer=STMicroelectronics, Max Operating Temperature=85°C, Max Power Dissipation=363mW, Max Supply Voltage=3.6V, Min Operating Temperature=-40°C, Min Supply Voltage=2V, Package Quantity=1500, Supplier Part Number 1=497-11515-ND, Address Bus Width=32b, Category=Microcontrollers, ComponentLink1Description=https://datasheet.ciiva.com/15122/getdatasheetpartid-69879-15122075.pdf?src-supplier=Verical, ComponentLink1URL=https://datasheet.ciiva.com/15122/getdatasheetpartid-69879-15122075.pdf?src-supplier=Verical, ComponentLink2Description=https://datasheet.ciiva.com/14100/pustm-arm-microcont-stm32f103-en-14100507.pdf?src-supplier=Distrelec, ComponentLink2URL=https://datasheet.ciiva.com/14100/pustm-arm-microcont-stm32f103-en-14100507.pdf?src-supplier=Distrelec, Core Architecture=ARM, Data Bus Width=32b, Designed by=BERK, Height=1.4mm, Lead Free="Lead Free", Length=7mm, Manufacturer Part Number=STM32F103C6T6A, Max Frequency=72MHz, Memory Size=32KB, Memory Type=FLASH, Number of ADC Channels=10, Number of Pins=48, Number of Programmable I/O=37, Number of SPI Channels=1, Number of Timers/Counters=3, Number of I2C Channels=1, Number of I/Os=37, Oscillator Type=Internal, Packaging=Tray, Peripherals="POR,PWM,WDT,DMA,Temp Sensor,I2C", Pricing 1="1=5,07000, 10=4,55000, 25=4,30120, 80=3,72763, 250=3,53648, 500=3,18600 (USD)", Pricing 2="250=1,99138, 260=1,95951, 510=1,91172, 1300=1,87986, 2500=1,84800, 13000=1,81613, 25000=1,78427 (USD)", Radiation Hardening=No, RAM Size=10KB, REACH SVHC="No SVHC", RoHS=Yes, RoHS Compliant=Yes, Series=STM32F103C6, SleepMode=OK, Stock 1=30, Stock 2=2360, Supplier 1=Digi-Key, Supplier 2=Avnet, Supplier Part Number 2=STM32F103C6T6A, Watchdog Timer=Yes, Weight=0.006409oz, Width=7mm, Interface=I2C,SPI,USART
X1: library part "CRYSTAL 32768kHZ", "Crystal, 32.768 kHz, SMD, 1.6mm x 1mm, 12.5 pF, 20 ppm, ABS05 Series", Case/Package=SMD/SMT, ESR (Equivalent Series Resistance)=90kR, Frequency=32.768kHz, Frequency Tolerance=20ppm, Load Capacitance=12.5pF, Manufacturer=Abracon, Max Operating Temperature=85°C, Min Operating Temperature=-40°C, Operating Frequency="32.768 kHz", Package Quantity=3000, Supplier Part Number 1=535-11899-1-ND, Category=Crystals, ComponentLink1Description=https://datasheet.ciiva.com/23810/abs05-23810480.pdf?src-supplier=Newark, ComponentLink1URL=https://datasheet.ciiva.com/23810/abs05-23810480.pdf?src-supplier=Newark, ComponentLink2Description=https://datasheet.ciiva.com/6728/abs05-6728949.pdf?src-supplier=Digi-Key, ComponentLink2URL=https://datasheet.ciiva.com/6728/abs05-6728949.pdf?src-supplier=Digi-Key, ComponentLink3Description=https://datasheet.ciiva.com/6728/abs05-6728950.pdf?src-supplier=Digi-Key, ComponentLink3URL=https://datasheet.ciiva.com/6728/abs05-6728950.pdf?src-supplier=Digi-Key, ComponentLink4Description=https://datasheet.ciiva.com/16411/abs05-16411149.pdf?src-supplier=Future+Electronics, ComponentLink4URL=https://datasheet.ciiva.com/16411/abs05-16411149.pdf?src-supplier=Future+Electronics, Depth=1mm, Designed by=BERK, Height=0.02inch, Lead Free="Lead Free", Length=1.6mm, Manufacturer Part Number=ABS05-32.768KHZ-T, Mount="Surface Mount", Number of Pins=2, Packaging="Tape and Reel", Pricing 1="1=1,16000, 10=1,02500, 50=0,95760, 100=0,84630, 500=0,80180, 1000=0,66816 (USD)", Radiation Hardening=No, REACH SVHC="No SVHC", RoHS=Yes, RoHS Compliant=Yes, Series=ABS05, Series Resistance=90kR, Stock 1=180522, Supplier 1=Digi-Key, Termination=SMD/SMT, Tolerance=20ppm, Width=0.039inch

## Free pads (board coordinates)
  round 0 hole 100: 5(2910.32,2615.22) 5(2913,3555) 5(5490.32,2612.22) 5(5490.32,3531.22)

## Via types
v1: diameter 30, hole 20, Top Layer to Bottom Layer, 40 vias
v2: diameter 30, hole 30, Top Layer to Bottom Layer, 1 vias
v3: diameter 50, hole 28, Top Layer to Bottom Layer, 1 vias

## Nets (pads, with @x,y where several pads share a name; then routed paths per layer and width w, separated by ;. In a path a pad name is that pad's centre, name@x,y a point inside that pad or via, vN(x,y) a via of type N, cw(c..) or ccw(c..) an arc to the next point about the centre after c; other vN are vias at no path point)
+3.3V: B1.1 B1.2 C9.2 C10.2 C11.2 C12.2 C13.2 C14.2 C15.1 C16.2 J9.1 R3.2 R5.1 R6.1 R8.1 R10.1 R12.1 R13.1 R14.2 U3.2 U3.4 U4.5 U5.1 U5.9 U5.24 U5.36 U5.48 | length 6782.9
  Top Layer w10: U5.48 4365.31,3197.41 4368.5,3197.41 4409.83,3156.07 4409.83,3152.88 U5.1 ; v1(4467,3036) 4467,2998.26 U4.5
  Top Layer w15: R10.1 3237,2632 3298,2571 3368.8,2571 B1.2@3426.13,2628.33 ; B1.2 B1.1 ; B1.1@3697.78,2628.33 3789.45,2720 4049,2720 4274.55,2945.55 4330.03,2945.55 4374,2989.52 4374,3044 4396,3066 ; C15.1@4301.71,3772.48 4328.75,3745.44 4328.75,3714.55 4409.83,3633.46 4409.83,3560.49 ; U5.48 4318.79,3197.41 4310,3206.2 4310,3513 4357.49,3560.49 4409.83,3560.49 ; U5.48@4365.31,3197.41 4408.24,3154.48 U5.1@4409.83,3152.88 ; U5.1@4408.24,3122.23 4396,3109.99 4396,3066 ; U5.36 4409.83,3560.49 ; 4415.96,3499.79 4439.17,3523 4465,3523 4473,3531 C10.2 C11.2 4524.5,3535 4578.5,3535 C12.2 C13.2 4631.5,3535 4682.5,3535 C14.2 4728.36,3534.5 4745.86,3517 C9.2 4758.14,3517 4814,3572.86 v1(4814,3584) ; v1(4467,3036) 4426,3036 4396,3066 ; U5.9 4568.91,3139.95 4568.91,3167.91 4577.7,3176.7 4587.64,3176.7 4606.94,3196 v1(4611,3196) 4648.78,3158.22 4648.78,3147.19 4665.31,3130.65 4721.65,3130.65 4755,3164 4894.24,3164 4927.02,3131.22 J9.1 5100.84,3131.22 5141.35,3090.72 5141.35,2936.01 5232.25,2845.1 R13.1 ; U5.24 4754.94,3413.94 4766,3425 v1(4781,3425) ; R8.1 5216.26,3216.74 5216.26,3315.26 v1(5219,3318) ; R6.1 5274.48,2998.83 5248,2972.35 R13.1 ; v1(5418,3262) 5418,3208.18 5323.6,3113.79 5291.17,3113.79 R14.2 5283.39,3096.95 5293.5,3086.84 5297.16,3086.84 5385,2999 5385,2907 5323.1,2845.1 R13.1
  Top Layer w20: B1.2@3426.13,2628.33 B1.2 ; B1.1 B1.1@3697.78,2628.33 ; U3.2 U3.4 R12.1@4031.18,3890.17 ; R12.1 4040.04,3902.97 4065.94,3928.87 4153.13,3928.87 4172,3910 C16.2 4228.14,3906.5 4237.89,3896.75 R3.2@4237.89,3881 ; C15.1@4301.71,3772.48 4276.87,3797.33 4276.87,3826.28 4237.89,3865.25 R3.2 R3.2@4237.89,3881 ; R5.1 4418.25,3852.27 4416.28,3852.27 4394.03,3874.52 4394.03,3912.45 4379.89,3926.59 4332.11,3926.59 4326.16,3920.64 4326.16,3919.59 4287.57,3881 R3.2@4237.89,3881
  Bottom Layer w10: v1(4467,3036) 4611,3180 v1(4611,3196) ; v1(4781,3425) 4781,3442 4814,3475 v1(4814,3584) ; v1(5219,3318) 5362,3318 v1(5418,3262)
+5V: C6.2 C7.1 C17.1 C18.2 D4.1 J3.1 R2.2 U2.3 U3.3 | length 2478.6
  Top Layer w15: C6.2@4153,2999 C6.2@4153,3021 ; C7.1 4187.47,2746.48 4247,2806.01 v1(4247,2826)
  Top Layer w20: J3.1 3751.8,3583 3914,3583 ; D4.1 3963.93,2657 4004.59,2697.67 4062.17,2697.67 4110.1,2745.6 4183.12,2745.6 C7.1 ; C18.2 4093,3842.5 4093,3772.96 4065.33,3745.29 4018.38,3745.29 3957.55,3684.46 U3.3 3957.55,3653.69 3947.87,3644 3925.72,3644 3914,3632.28 3914,3583 ; v1(4115,2961) C6.2@4153,2999 ; U2.3 4168.55,3215.24 4147.06,3236.73 4043.3,3236.73 4004.97,3275.06 3974.29,3275.06 3914,3335.35 3914,3583
  Top Layer w35: C6.2@4153,3021 4153,3129 4154.56,3130.56 4154.56,3173.68 U2.3 ; C6.2 4296.25,3003 4299.25,3000 R2.2
  Bottom Layer w20: v1(4115,2961) 4115,2883 4172,2826 v1(4247,2826)
+12V: C1.1 C2.2 C3.1 C4.2 J2.1 R1.2 U1.3 U2.1 | length 2066.6
  Top Layer w35: J2.1 3151.37,3774.63 3151.37,3748.63 3423,3477 3423,3294 3400.74,3271.74 3375.51,3271.74 U1.3@3348.77,3245 ; U1.3 U1.3@3348.77,3245 ; C2.2 C2.2@3679.5,2917.5 ; R1.2 3724.81,3006.81 R1.2@3724.81,2997.48 ; U2.1 3987.45,3076.12 3998.64,3064.93 3998.64,3005.36 C3.1 3998.64,2954.64 3998.64,2925.76 3901.87,2829 C4.2 3742.26,2829 3712.15,2859.11 3712.15,2884.85 C2.2@3679.5,2917.5 ; U1.3@3348.77,3245 3538.74,3055.04 3538.74,3015.4 3556.65,2997.48 C1.1 R1.2@3724.81,2997.48 ; C2.2@3679.5,2917.5 3724.81,2962.81 R1.2@3724.81,2997.48
+24V: C5.1 C8.2 J1.1 U1.1 | length 422.8
  Top Layer w35: J1.1 3140,3012.99 3162.49,3035.48 C5.1 3400.52,3035.48 3423.5,3012.5 C8.2
BOOT0: B1.3 B1.4 C19.2 R11.2 U5.44 | length 1497.4
  Top Layer w15: R11.2 3336,2758.5 3345,2767.5 C19.2 3346.5,2772.5 3438.41,2772.5 B1.4 B1.3 3694.3,2763.7 3778.3,2763.7 v1(3785,2757) ; U5.44 4391.85,3276.15 4404,3264 4404,3251.87 v1(4406.87,3249)
  Bottom Layer w10: v1(3785,2757) 4103,3075 4103,3188 4129.98,3214.98 4384.98,3214.98 4392.05,3222.05 4392.05,3228.77 4406.87,3243.59 v1(4406.87,3249)
GND: B2.3 B2.4 C1.2 C2.1 C3.2 C4.1 C5.2 C6.1 C7.2 C8.1 C9.1 C10.1 C11.1 C12.1 C13.1 C14.1 C15.2 C16.1 C17.2 C18.1 C19.1 C20.1 C21.1 C22.1 C23.1 C24.1 D1.1 D2.1 D3.1 D6.1 J1.2 J2.2 J3.2 J4.2 J5.2 J6.5 J6.SH1 J6.SH2 J6.SH3 J6.SH4 J6.SH5 J6.SH6 J7.2 J8.2 J9.5 R7.2 R11.1 U1.2 U1.4 U2.2 U3.1 U4.2 U5.8 U5.23 U5.35 U5.47
IN: R15.2 U5.5 Y1.1 | length 740.7
  Top Layer w13: U5.5 4488.57,3097.43 4537.65,3048.35 4775.65,3048.35 4777.16,3046.84 4801.74,3046.84 4835.28,3013.31 Y1.1 4835.28,2971.32 4797,2933.04 4797,2818.11 4828.56,2786.55 4828.56,2752.37 4842.93,2738 R15.2
IN__1: C23.2 U5.3 X1.2 | length 832.1
  Top Layer w10: v1(4264,3416.16) 4260.17,3412.33 4246.33,3412.33 4222,3388 4222,3339 4256.17,3304.83 4256.17,3281.83 C23.2 4256.75,3276 4242.43,3261.68 4242.43,3256.43 4211.75,3225.75 4211.75,3180.75 4224.15,3168.35 X1.2 ; U5.3 4449.2,3192.26 4480.94,3224 v1(4491,3224)
  Top Layer w13: U5.3@4448.61,3138.95 U5.3
  Bottom Layer w10: v1(4264,3416.16) 4377.84,3416.16 4493.15,3300.85 4493.15,3226.15 v1(4491,3224)
MISO: J10.3 U5.16 | length 1477.4
  Top Layer w10: U5.16 4703.14,3256.46 4826.68,3380 v1(4843,3380) ; J10.3 5195.76,2632.76 5233.46,2632.76 5286.7,2686 5369.06,2686 5425,2741.94 v1(5425,2835)
  Bottom Layer w10: v1(4843,3380) 4864.36,3380 5026,3218.36 5026,3085 5069.11,3041.89 5112.76,3041.89 5119.8,3034.85 5225.15,3034.85 v1(5425,2835)
MOSI: J10.4 U5.17 | length 1512.6
  Top Layer w10: U5.17 4703.14,3276.15 4732,3305.01 4732,3334 4831,3433 v1(4831,3445) ; J10.4 5322,2659 5429,2659 5497,2727 v1(5497,2805)
  Bottom Layer w10: v1(4831,3445) 4871.5,3445 5489.35,2827.16 5489.35,2812.65 v1(5497,2805)
NetC20_2: C20.2 Y1.2 | length 218.3
  Top Layer w13: Y1.2 4850.43,3084.77 4850.43,3050.87 4863.59,3037.72 4863.59,2981.02 4845,2962.43 C20.2
NetC22_2: C22.2 Y1.4 | length 170.3
  Top Layer w13: Y1.4@4806.97,3094.97 4806.97,3128.19 4810.89,3132.11 4859.67,3132.11 4863.53,3128.24 4863.53,3117.59 4905.13,3076 C22.2
NetD1_2: D1.2 R2.1 | length 134.3
  Top Layer w20: R2.1 4315,2769.59 4322.19,2762.4 D1.2
NetD2_2: D2.2 R1.1 | length 132.2
  Top Layer w35: D2.2 3825.4,2973.55 3845.1,2993.25 R1.1
NetD3_2: D3.2 R3.1 | length 139.8
  Top Layer w20: R3.1 4363.02,3869.98 4363.02,3811.57 4405.19,3769.4 D3.2
NetD4_2: D4.2 J6.1 | length 689.7
  Top Layer w10: D4.2 4061.15,2657 4086.46,2631.69 4086.46,2620.54 4139,2568 4400.01,2568 4496,2663.99 4496,2732.3 4548,2784.3 J6.1
NetD5_2: D5.2 R10.2 | length 161
  Top Layer w15: D5.2 3159.81,2723 3166.09,2729.28 3166.09,2775.85 3221.25,2831.01 R10.2
NetD6_2: D6.2 R13.2 | length 109.3
  Top Layer w10: R13.2 5258.39,2716.6 D6.2
NetJ6_2: J6.2 R4.1 | length 90.2
  Top Layer w10: J6.2 4573.59,2861.9 4590.3,2878.61 R4.1
NetJ6_3: J6.3 R9.1 | length 129.2
  Top Layer w10: J6.3 4599.18,2821.7 4648.37,2870.89 4674.67,2870.89 R9.1
NetJ6_4: J6.4 R7.1 | length 181.8
  Top Layer w10: J6.4 4624.77,2821.7 4654.07,2851 4743.22,2851 4749.08,2856.86 4749.08,2867.08 R7.1
NSS: J10.1 U5.14
OUT: R15.1 U5.6 Y1.3 | length 872.7
  Top Layer w13: U5.6 4508.26,3114.74 4544.69,3078.31 v1(4656,3078.31) ; v1@4661.62,3082.62 4677.02,3067.22 4732.04,3067.22 4760.2,3095.37 Y1.3 ; R15.1 4859.07,2665.17 4895.91,2702 v1(4917,2702)
  Bottom Layer w10: v1(4656,3078.31) 4917,2817.32 v1(4917,2702)
OUT__1: C24.2 U5.4 X1.1 | length 602.4
  Top Layer w10: v1(4235.73,3194.83) 4246.33,3194.83 4263.16,3211.65 X1.1 4273,3238.23 4294.71,3259.95 4294.71,3435.54 4269.25,3461 C24.2 ; U5.4 4469.12,3138.59 4469.12,3183.68 v1(4469.36,3183.92)
  Bottom Layer w10: v1(4235.73,3194.83) 4240.56,3190 4463.5,3190 4463.5,3189.77 v1(4469.36,3183.92)
PA_1: J4.1 R5.2 U5.26 | length 1358.1
  Top Layer w10: R5.2 4939.31,3911.48 J4.1 5066.8,3716.8 4806.15,3456.15 4717.91,3456.15 4705.98,3444.22 4617.74,3444.22 4607.59,3454.38 4607.59,3472.09 U5.26
PA_2: J5.1 R6.2 U5.12 | length 1328.2
  Top Layer w10: U5.12 4626.37,3120.64 4643.01,3104 4687.14,3104 4692.32,3098.83 4702.17,3098.83 v1(4706,3095) ; v1(4911,3220) 5054,3220 v1(5061,3227) 5041.35,3246.65 5041.35,3344.86 J5.1 ; v1(5164,3055) 5164,3048.74 5209.52,3003.22 R6.2
  Bottom Layer w10: v1(4706,3095) 4865,2936 4948.5,2936 4988,2975.5 4988,3143 v1(4911,3220) ; v1(5061,3227) 5061,3216 5164,3113 v1(5164,3055)
PA_3: J7.1 R8.2 U5.13 | length 1287.2
  Top Layer w10: U5.13 4728.11,3197.41 4806.12,3275.42 4817.06,3275.42 4970.64,3429 5077,3429 5278.48,3630.48 ; R8.2 5278.48,3630.48 ; J7.1 5278.48,3630.48
PA_4: J8.1 R12.2 U5.25 | length 1233.7
  Top Layer w10: R12.2 4105,3899.03 4149.63,3854.4 4149.63,3824.08 4194.71,3779 v3(4202,3779) ; U5.25 4759.77,3473 4840,3553.23 4840,3642 J8.1 4691.5,3784 4649.5,3742 v2(4640,3742)
  Bottom Layer w10: v3(4202,3779) 4398.41,3779 4437.94,3739.48 4637.48,3739.48 v2(4640,3742)
PC13: D5.1 U5.2 | length 1804.8
  Top Layer w15: D5.1 3159.81,2648.2 3224.01,2584 v1(3226,2584) ; U5.2 4429.52,3232.7 4453.47,3256.65 4460.6,3256.65 4468.94,3265 v1(4473,3265)
  Bottom Layer w10: v1(3226,2584) 3459,2584 4164,3289 4449,3289 v1(4473,3265)
RESET: B2.1 B2.2 C21.2 R14.1 U5.7 | length 1246.6
  Top Layer w10: U5.7 4527.94,3175.94 v1(4566,3214) ; v1(4788,3194) 5126.31,3194 R14.1@5206.61,3113.7 ; C21.2 5287,2926.5 5322.35,2926.5 5339,2943.15 B2.1 5339,2966.78 5305.05,3000.73 5305.05,3006.57 5225.74,3085.88 5219.04,3085.88 5206.61,3098.3 R14.1 R14.1@5206.61,3113.7 ; B2.2 5302.35,3197.09 5296.38,3191.13 5281.96,3191.13 5206.61,3115.78 R14.1@5206.61,3113.7
  Bottom Layer w10: v1(4566,3214) 4568.15,3216.15 4662.08,3216.15 4684.23,3194 v1(4788,3194)
SCK: J10.2 U5.15 | length 1042
  Top Layer w10: U5.15 4730.78,3236.78 v1(4829,3335) ; v1(5047,2743) 5085,2705 J10.2
  Bottom Layer w10: v1(4829,3335) 4906,3258 4972,3258 5004,3226 5004,2786 v1(5047,2743)
SWCLK: J9.3 U5.37 | length 916.7
  Top Layer w10: U5.37 4381.06,3413.94 4544,3251 4608,3251 4616,3259 v1(4629,3259) ; v1(4959,3045) 4972,3045 5003.89,3013.11 J9.3
  Bottom Layer w10: v1(4629,3259) 4751.5,3259 4959,3051.5 v1(4959,3045)
SWDIO: J9.2 U5.34 | length 1060.8
  Top Layer w10: v1(4358,3492) 4358,3481.18 4370.78,3468.39 4370.78,3468.22 4403,3436 4432,3436 4448.3,3452.3 4448.3,3472.09 U5.34 ; v1(4948,3108.57) 4984.4,3072.17 J9.2
  Bottom Layer w10: v1(4358,3492) 4575,3492 4948,3119 v1(4948,3108.57)
TDI: J9.4 U5.38 | length 922.6
  Top Layer w10: U5.38 4351.69,3393.35 4377.65,3393.35 4533,3238 4584.64,3238 4599.64,3223 4616,3223 4675.79,3163.21 4691.79,3163.21 v1(4695,3160) ; v1(4962,2994) 5001.94,2954.06 J9.4
  Bottom Layer w10: v1(4695,3160) 4796,3160 v1(4962,2994)
USB_N: R4.2 U4.1 U4.6 U5.32 | length 853.2
  Top Layer w10: v1(4403,2992) 4439.79,2992 4446.6,2985.19 U4.6 U4.6@4446.6,2973.78 ; U4.6@4446.6,2966.3 4470.9,2942 4528.01,2942 4541.4,2955.39 R4.2 ; U5.32 4488.57,3455.28 4521,3422.86 v1(4521,3415)
  Top Layer w15: U4.1 4446.6,2966.3 U4.6@4446.6,2973.78
  Bottom Layer w10: v1(4403,2992) 4403,3070 4520,3187 4520,3414 v1(4521,3415)
USB_P: R9.2 U4.3 U4.4 U5.33 | length 985.6
  Top Layer w10: v1(4447,3073) 4452.41,3073 4457.7,3067.71 4491.01,3067.71 4521.4,3037.32 U4.4 4649.87,2981.26 R9.2@4673.13,2958 ; U5.33 4468.89,3368.11 v1(4552,3285) ; R9.2@4679.06,2958 R9.2
  Top Layer w15: U4.3 4521.4,2903.7 4525.71,2908.01 4601.48,2908.01 4633.15,2939.69 4647.31,2953.84 4674.91,2953.84 R9.2@4679.06,2958
  Bottom Layer w10: v1(4447,3073) 4535.85,3161.85 4535.85,3226.49 4552,3242.64 v1(4552,3285)
pads on no net: J9.6 U5.10 U5.11 U5.18 U5.19 U5.20 U5.21 U5.22 U5.27 U5.28 U5.29 U5.30 U5.31 U5.39 U5.40 U5.41 U5.42 U5.43 U5.45 U5.46

## Keep-outs
Keep-Out Layer:
  lines w10: 2850,2550 5550,2550 5550,3950 5500,3950 2850,3950 2850,2550

## Other copper
Top Layer:
  region net +12V: 3143,3783 3143,3544 3353,3544 3354,3545
  region net +5V: 3544,3606 3552.8,3614.8 3552.8,3769.2 3716,3606
  region net +5V: 3905,3606 3544,3606 3544,3580 3540,3576 3913,3576 3915,3574
  region net +24V: 3160,3396 3160,3141.98 3018,2999.98 3018,3394
  region net +24V: 3018,3470 3019,3471 3378,3471 3378,3416 3356,3394 3018,3394
  region: 3045,3444
  region net +24V: 3020.03,3012.99 2920,3113.02 2920,3470 3018,3470
  region: 3159,3150
  region net +24V: 3078.04,3071 3301,3071 3301,3000 3287,2986 3015,2986 3015,3007.96

## Text inside footprints (layer, text, board x,y; h text height)
J9: Top Overlay "1" at 5171.55,3217.99 h60 r90